# Altium PCB F_keys-leonardo-squeezed.PcbDoc
Units mil, origin at the board's own origin, x right, y up, seen from the top; angles counter-clockwise.
Board outline 11000 x 500 mil, 2 copper layers (Top Layer, Bottom Layer); 62 components, 56 nets, 261 pads, 90 vias.
Unrouted connection lines stored in the file: 3.
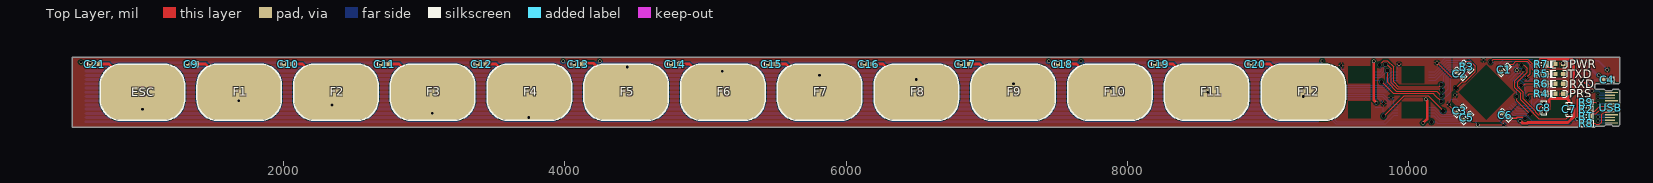
[diagram p0: Top Layer view]
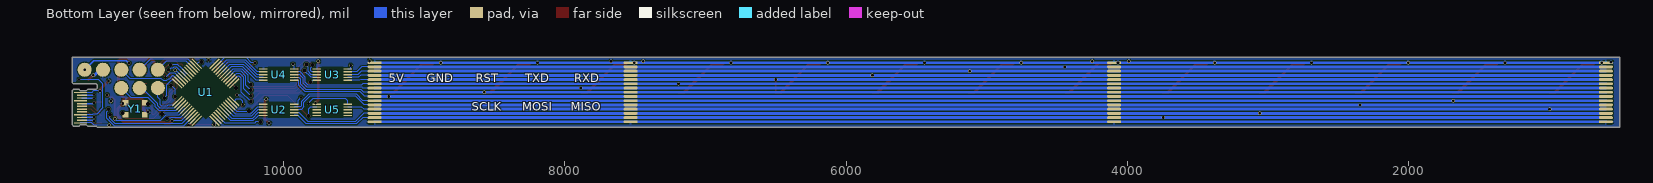
[diagram p1: Bottom Layer view, seen from below]
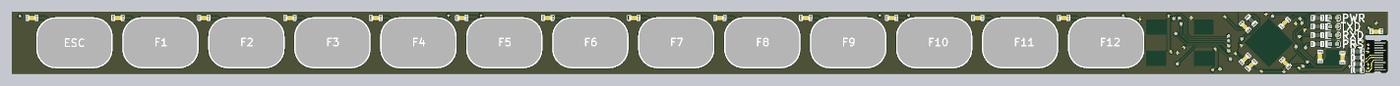
[diagram p2: 3D render of the assembled board from above, using the file's embedded part models]

## Layer stack, top to bottom
Top Solder: solder mask 0.4, Solder Resist, Dk 3.5
Top Layer: signal copper 1.4
Dielectric 1: dielectric 12.6, FR-4, Dk 4.8
Bottom Layer: signal copper 1.4
Bottom Solder: solder mask 0.4, Solder Resist, Dk 3.5

## Board outline
500,750 11320,750 11330,760 11390,760 11400,770 11440,770 11450,760 11490,760 11500,770 11500,1010 11490,1020 11450,1020 11440,1010 11400,1010 11390,1020 11330,1020 11320,1030 11320,1050 11330,1060 11490,1060 11500,1070 11500,1250 500,1250

## Design rules (kind name [scope] priority, off if disabled: settings)
Clearance [All] p1: gap=10 ignorepadtopadclearanceinfootprint=TRUE except(0: Arc-Hole Track-Hole SMDPad-Hole THPad-Hole Via-Hole Fill-Hole Poly-Hole Region-Hole Text-Hole; 6: Arc-Via Track-Via; 8: Arc-Arc Arc-Track Track-Track SMDPad-SMDPad)
ComponentClearance [All] p1 off: gap=10 collisioncheckmode=3 verticalgap=10 showdistances=FALSE
DiffPairsRouting [All] p1: maxlimit=10 minlimit=8 mostfreqgap=8 toplayer_minwidth=5 toplayer_maxwidth=15 toplayer_prefwidth=15 bottomlayer_minwidth=5 bottomlayer_maxwidth=15 bottomlayer_prefwidth=15 maxuncoupledlength=500
PolygonConnect [All] p1: connectstyle=Relief reliefconductorwidth=10 reliefentries=4 polygonreliefangle="90 Angle" airgapwidth=10
RoutingVias [All] p1: holewidth=28 width=50 viastyle="Through Hole" minholewidth=28 minwidth=50 maxholewidth=28 maxwidth=50
SolderMaskExpansion [All] p1: expansion=4 istentingtop=FALSE
Width [All] p1: maxlimit=100 minlimit=5 preferedwidth=10 minimp=50.000000 maximp=50.000000 favimp=50.000000
28 further rules are at their usual default settings.

## Classes and differential pairs
differential pair X: +X_P -X_N
differential pair D: +D_P -D_N
differential pair C: +C_P -C_N

## Components (designator, comment, footprint, x,y, rotation, side; value= is the part's Value field where it differs from the comment)
5V "Point" Point 11410,1160 r180 bottom
C1 "Cap" 0603P 10677.63,1160.55 r45 top value=0.1uF
C2 "Cap" 0603P 10360,1130 r315 top value=0.1uF
C3 "Cap" 0603P 10360,870 r225 top value=0.1uF
C4 "Cap" 0603P 11410,1090 r0 top value=1uF
C5 "Cap" 0603P 10410,820 r225 top value=0.1uF
C6 "Cap" 0603P 10684.09,835.91 r135 top value=1uF
C7 "Cap" 0603P 11140,880 r270 top value=10pF
C8 "Cap" 0603P 10960,890 r90 top value=10pF
C9 "Cap" 0603P 1347.5,1200 r180 top value=10pF
C10 "Cap" 0603P 2035,1200 r180 top value=10pF
C11 "Cap" 0603P 2722.5,1200 r180 top value=10pF
C12 "Cap" 0603P 3410,1200 r180 top value=10pF
C13 "Cap" 0603P 4097.5,1200 r180 top value=10pF
C14 "Cap" 0603P 4785,1200 r180 top value=10pF
C15 "Cap" 0603P 5472.5,1200 r180 top value=10pF
C16 "Cap" 0603P 6160,1200 r180 top value=10pF
C17 "Cap" 0603P 6847.5,1200 r180 top value=10pF
C18 "Cap" 0603P 7535,1200 r180 top value=10pF
C19 "Cap" 0603P 8222.5,1200 r180 top value=10pF
C20 "Cap" 0603P 8910,1200 r180 top value=10pF
C21 "Cap" 0603P 660,1200 r180 top value=10pF
ESC "Key" Key 1300,1200 r180 top
F1 "Key" Key 1987.5,1200 r180 top
F2 "Key" Key 2675,1200 r180 top
F3 "Key" Key 3362.5,1200 r180 top
F4 "Key" Key 4050,1200 r180 top
F5 "Key" Key 4737.5,1200 r180 top
F6 "Key" Key 5425,1200 r180 top
F7 "Key" Key 6112.5,1200 r180 top
F8 "Key" Key 6800,1200 r180 top
F9 "Key" Key 7487.5,1200 r180 top
F10 "Key" Key 8175,1200 r180 top
F11 "Key" Key 8862.5,1200 r180 top
F12 "Key" Key 9550,1200 r180 top
GND "Point" Point 11280,1160 r180 bottom
MISO "Point" Point 10890,1030 r90 bottom
MOSI "Point" Point 11020,1030 r90 bottom
PRS "LED0" D0603 11070,990 r270 top
PWR "LED0" D0603 11070,1200 r270 top
R1 "Res3" 0603L 11260,830 r180 top value=22
R2 "Res3" 0603L 11260,880 r180 top value=22
R3 "Res3" 0603L 10410,1180 r315 top value=1K
R4 "Res3" 0603L 10940,990 r180 top value=1K
R5 "Res3" 0603L 10940,1130 r180 top value=1K
R6 "Res3" 0603L 10940,1060 r180 top value=1K
R7 "Res3" 0603L 10940,1200 r180 top value=1K
R8 "Res3" 0603L 11260,780 r0 top value=1.5K
R9 "Res3" 0603L 11260,930 r0 top value=1.5K
RST "Point" Point 11150,1160 r180 bottom
RXD "LED0" D0603 11070,1060 r270 top
RXD "Point" Point 10890,1160 r180 bottom
SCLK "Point" Point 11150,1030 r90 bottom
TXD "LED0" D0603 11070,1130 r270 top
TXD "Point" Point 11020,1160 r180 bottom
U1 "ATmega32U4-AU" 32U4 10550,1000 r135 top
U2 "BS814A-1" BS814A-1 9950,935 r270 top
U3 "BS814A-1" BS814A-1 9570,1185 r270 top
U4 "BS814A-1" BS814A-1 9950,1185 r270 top
U5 "BS814A-1" BS814A-1 9570,935 r270 top
USB "TYPEC" TYPEC 11504.06,715 r180 top
Y1 "XTAL" 3225 11001.89,820.32 r0 top

## Footprints (in the part's own frame and the unit in brackets; to place one, negate y for a bottom-side part, rotate by r counter-clockwise, add the part's x,y. Pads: shape width x height; smd on the part's side, far side on the other; paste and mask are expansions set on the pad)
32U4 [mm]
  rect 2.5x0.25 smd far side: 1(-4.75,2.5) 2(-4.75,2) 3(-4.75,1.5) 4(-4.75,1) 5(-4.75,0.5) 6(-4.75,0) 7(-4.75,-0.5) 8(-4.75,-1) 9(-4.75,-1.5) 10(-4.75,-2) 11(-4.75,-2.5) 23(4.75,-2.5) 24(4.75,-2) 25(4.75,-1.5) 26(4.75,-1) 27(4.75,-0.5) 28(4.75,0) 29(4.75,0.5) 30(4.75,1) 31(4.75,1.5) 32(4.75,2) 33(4.75,2.5)
  rect 0.25x2.5 smd far side: 12(-2.5,-4.75) 13(-2,-4.75) 14(-1.5,-4.75) 15(-1,-4.75) 16(-0.5,-4.75) 17(0,-4.75) 18(0.5,-4.75) 19(1,-4.75) 20(1.5,-4.75) 21(2,-4.75) 22(2.5,-4.75) 34(2.5,4.75) 35(2,4.75) 36(1.5,4.75) 37(1,4.75) 38(0.5,4.75) 39(0,4.75) 40(-0.5,4.75) 41(-1,4.75) 42(-1.5,4.75) 43(-2,4.75) 44(-2.5,4.75)
0603L [mil]
  rect 30x30 smd: 1(-27.5,0) 2(27.5,0)
  silkscreen extent -50,-20 50,20, body extent -33,-16 31,16, height 21
0603P [mil]
  rect 30x30 smd: 1(-27.5,0) 2(27.5,0)
  silkscreen extent -50,-20 50,20, body extent -32,-16 32,16, height 28
3225 [mm]
  rect 1x1 smd far side: 1(-0.5,2.7) 2(3,0.5) GND(-0.5,0.5) GND(3,2.7)
BS814A-1 [mil]
  rect 10x60 smd far side: 1(20,-30) 2(40,-30) 3(60,-30) 4(80,-30) 5(100,-30) 6(100,190) 7(80,190) 8(60,190) 9(40,190) 10(20,190)
D0603 [mil]
  rect 30x30 smd: 1(0,27.5) 2(0,-27.5)
  silkscreen extent -27,-67 27,55, body extent -15,-39 15,38, height 12
Key [mil]
  rrect75% 600x400 smd mask+4: 1(300,200)
  silkscreen extent 0,0 600,400
Point [mil]
  round 100 smd: 1(0,0)
TYPEC [mm]
  rect 2.3x0.25 smd: A1(1.631,-1.691) A4(1.631,-3.191) A9(1.631,-5.691) A12(1.631,-7.191)
  rect 1.8x0.25 smd: A2(1.881,-2.191) A3(1.881,-2.691) A5(1.881,-3.691) A6(1.881,-4.191) A7(1.881,-4.691) A8(1.881,-5.191) A10(1.881,-6.191) A11(1.881,-6.691)
  rect 2.3x0.25 smd far side: B1(1.631,-7.191) B4(1.631,-5.691) B9(1.631,-3.191) B12(1.631,-1.691)
  rect 1.8x0.25 smd far side: B2(1.881,-6.691) B3(1.881,-6.191) B5(1.881,-5.191) B6(1.881,-4.691) B7(1.881,-4.191) B8(1.881,-3.691) B10(1.881,-2.691) B11(1.881,-2.191)
  Bottom Layer lines w0.254: 4.051,-2.028 3.888,-2.191 1.881,-2.191 ; 4.051,-2.79 3.952,-2.691 1.881,-2.691 ; 4.051,-5.33 3.912,-5.191 2.92,-5.191 1.881,-5.191 ; 4.051,-6.092 3.952,-6.191 1.881,-6.191 ; 4.051,-6.854 3.888,-6.691 1.881,-6.691

## Part data
C1 C2 C3 C4 C5 C6 C7 C8 C9 C10 C11 C12 C13 C14 C15 C16 C17 C18 C19 C20 C21: "Capacitor", LatestRevisionDate=17-Jul-2002, LatestRevisionNote="Re-released for DXP Platform.", PackageDescription="Radial Cap, Thru-Hole; 2 Leads; 0.3 in Pin Spacing", PackageReference=RAD-0.3, Published=8-Jun-2000, Publisher="Altium Limited"
PRS PWR RXD TXD: "Typical INFRARED GaAs LED", LatestRevisionDate=08-Jul-2005, LatestRevisionNote="Mech Layer 1 removed.", PackageDescription="LED; 2 Leads", PackageReference=LED-0, Published=8-Jun-2000, Publisher="Altium Limited"
R1 R2 R3 R4 R5 R6 R7 R8 R9: "Resistor", LatestRevisionDate=29-May-2009, LatestRevisionNote="IPC-7351 Footprint Added.", PackageDescription="Chip Resistor", PackageReference=J1-0603, Published=8-Jun-2000, Publisher="Altium Limited"
U1: "8-bit AVR Microcontroller, 2.7-5.5V, 32KB Flash, 2.5KB EEPROM, 1KB SRAM, USB Controller, 44-pin TQFP, Industrial Grade (-40癈 to 85癈)", Supplier Part Number 1=ATMEGA32U4-AU-ND, ComponentLink1Description="Manufacturer Link", ComponentLink1URL=http://www.atmel.com/products/avr/default.asp?, ComponentLink2Description="ATmega16U4/32U4 Datasheet", ComponentLink2URL=http://www.atmel.com/dyn/resources/prod_documents/doc7766.pdf, ComponentLink3Description="ATmega16U4 ATmega32U4 Summary", ComponentLink3URL=http://www.atmel.com/dyn/resources/prod_documents/7766S.pdf, ComponentLink4Description="Atmel.com Home", ComponentLink4URL=http://www.atmel.com, DatasheetVersion="revD, Jan-2009", PackageDescription="44-Pin Plastic Thin Quad Flat Pack, 10 x 10 x 1.0 mm Body, 0.8 mm Pitch (TQFP)", PackageReference=44ML, PackageVersion="rev.G, Jul-2007", Published=1-Apr-2010, Publisher="Altium Limited", Supplier 1=Digi-Key, Supplier 2=Farnell, Supplier 3=Mouser, Supplier Part Number 2=1748525, Supplier Part Number 3=556-ATMEGA32U4-AU
Y1: "Crystal Oscillator", LatestRevisionDate=17-Jul-2002, LatestRevisionNote="Re-released for DXP Platform.", PackageDescription="Crystal, Thru-Hole; 2 Leads; Body 3.1 x 8.2 mm (Dia.xH)", PackageReference=R38, Published=8-Jun-2000, Publisher="Altium Limited"

## Free pads (board coordinates)
  rrect100% 100x20 smd far side: trans_1(600,1150) trans_1(4095,1150) trans_1(7530,1150) trans_1(9350,1150) trans_2(600,1120) trans_2(4095,1120) trans_2(7530,1120) trans_2(9350,1120) trans_3(600,1090) trans_3(4095,1090) trans_3(7530,1090) trans_3(9350,1090) trans_4(600,1060) trans_4(4095,1060) trans_4(7530,1060) trans_4(9350,1060) trans_5(600,1030) trans_5(4095,1030) trans_5(7530,1030) trans_5(9350,1030) trans_6(600,1000) trans_6(4095,1000) trans_6(7530,1000) trans_6(9350,1000) trans_7(600,970) trans_7(4095,970) trans_7(7530,970) trans_7(9350,970) trans_8(600,940) trans_8(4095,940) trans_8(7530,940) trans_8(9350,940) trans_9(600,1180) trans_9(4095,1180) trans_9(7530,1180) trans_9(9350,1180) trans_10(600,910) trans_10(4095,910) trans_10(7530,910) trans_10(9350,910) trans_11(600,880) trans_11(4095,880) trans_11(7530,880) trans_11(9350,880) trans_12(600,850) trans_12(4095,850) trans_12(7530,850) trans_12(9350,850) trans_13(600,820) trans_13(4095,820) trans_13(7530,820) trans_13(9350,820) trans_14(600,1210) trans_14(4095,1210) trans_14(7530,1210) trans_14(9350,1210) trans_15(600,790) trans_15(4095,790) trans_15(7530,790) trans_15(9350,790)

## Via types
v1: diameter 23.62, hole 19.68, Top Layer to Bottom Layer, 61 vias
v2: diameter 28, hole 28, Top Layer to Bottom Layer, 24 vias
v3: diameter 20, hole 19.5, Top Layer to Bottom Layer, tented both sides, 5 vias

## Nets (pads, with @x,y where several pads share a name; then routed paths per layer and width w, separated by ;. In a path a pad name is that pad's centre, name@x,y a point inside that pad or via, vN(x,y) a via of type N, cw(c..) or ccw(c..) an arc to the next point about the centre after c; other vN are vias at no path point)
00R: RXD.1@10890,1160 U1.20 | length 293.4
  Bottom Layer w8: U1.20 10641.56,1173.99 10687.56,1220 10830,1220 RXD.1@10890,1160
01T: TXD.1@11020,1160 U1.21 | length 433.1
  Bottom Layer w8: U1.21@10634.86,1196.22 10674.64,1236 10944,1236 TXD.1@11020,1160
02: U1.19
03: U1.18
04: U1.25 U4.9 | length 376
  Bottom Layer w8: U4.9 10182.37,1145 10265.05,1227.68 10404.76,1227.68 10458.44,1173.99 U1.25
05*: U1.31 U3.7 | length 887.2
  Top Layer w8: v2(9848.06,1153.46) 9848.06,1071.68 9911.75,1008 10197,1008 v2(10230,975)
  Bottom Layer w8: U3.7 9761,1106 9801.05,1106 9848.06,1153.01 v2(9848.06,1153.46) ; v2(10230,975) 10279.89,1024.89 10279.89,1106.38 10304.42,1130.92 10334.49,1130.92 10374.93,1090.48 U1.31
06*: U1.27 U4.7 | length 349.8
  Bottom Layer w8: U4.7 10187.63,1105 10262.63,1180 10263,1180 10278.68,1195.68 10381.08,1195.68 10430.6,1146.15 U1.27
07: U1.1
08*: U1.28 U4.6 | length 336.6
  Bottom Layer w8: U4.6 10141,1086 10170.34,1086 10191.63,1086 10285.3,1179.68 10369.24,1179.68 10416.69,1132.23 U1.28
09*: U1.29 U3.9 | length 957.6
  Top Layer w8: v2(9790,1195) 9820.29,1225.29 9846.6,1225.29 9892.06,1179.83 9892.06,1072.94 9925,1040 10215,1040 v2(10230,1055)
  Bottom Layer w8: U3.9 9761,1146 9795.8,1146 9804.06,1154.26 9804.06,1175.74 9790,1189.8 v2(9790,1195) ; v2(10230,1055) 10230,1060 10247.89,1077.89 10247.89,1119.64 10291.93,1163.68 10357.4,1163.68 10402.77,1118.32 U1.29
10*: U1.30 U3.8 | length 924.8
  Top Layer w8: v2(9835,1197.29) 9838.83,1193.47 9848.94,1193.47 9876.06,1166.35 9876.06,1066.31 9918.37,1024 10215.59,1024 10224.59,1015 v2(10230,1015)
  Bottom Layer w8: U3.8 9761,1126 9798.43,1126 9820.06,1147.64 9820.06,1176.94 9835,1191.88 v2(9835,1197.29) ; v2(10230,1015) 10263.89,1048.89 10263.89,1113.01 10298.56,1147.68 10346.64,1147.68 U1.30
11*: R4.2 U1.12 | length 295.3
  Top Layer w8: v2(10844.53,960.53) 10847.83,963.83 10847.83,981.4 10856.43,990 R4.2
  Bottom Layer w8: U1.12 10783.15,1093.96 10784.45,1093.96 10804.46,1073.95 10805.94,1073.95 10826,1053.89 10826,979.05 v2(10844.53,960.53)
12: U1.26 U4.8 | length 362.9
  Bottom Layer w8: U4.8 10185,1125 10271.68,1211.68 10392.92,1211.68 10444.52,1160.07 U1.26
13*: U1.32 U3.6 | length 801
  Top Layer w8: v2(9806.26,1074) 9806.26,1073.74 9888,992 10173,992 10182,983 v2(10230,935)
  Bottom Layer w8: U3.6 9785,1085 9792.43,1077.57 9802.69,1077.57 v2(9806.26,1074) ; v2(10230,935) 10295.89,1000.89 10295.89,1099.76 10311.05,1114.92 10322.65,1114.92 10329.58,1107.99 10330.66,1107.99 U1.32@10353.78,1084.86
18: R6.2 U1.8 | length 545.9
  Top Layer w8: v2(10766.73,970) 10767.37,969.36 10767.37,938.59 v2(10860,845.96) ; v2(10796,1049.95) 10799.83,1053.78 10819.83,1053.78 10826.05,1060 R6.2
  Bottom Layer w8: U1.8 10753.68,852 10840.4,852 10842.62,849.78 10856.17,849.78 v2(10860,845.96) ; v2(10766.73,970) 10766.73,1020.68 v2(10796,1049.95)
+5: 5V.1 C1.2 C2.2 C3.2 C4.2 PRS.1 PWR.1 RXD.1@11097.5,1060 TXD.1@11097.5,1130 U1.2 U1.7 U1.14 U1.24 U1.34 U1.44 U2.1 U3.1 U4.1 U5.1 USB.B9 | length 3561.5
  Top Layer w8: v1(10200,1210) 10299.45,1110.55 C2.2 ; v1(10286.15,913.12) 10289.14,910.13 10289.14,901.97 C3.2 ; v1(10490,770) 10492.33,767.67 10670.35,767.67 v1(10672.67,765.35) ; 10710,1190 10719.45,1199.45 10740.79,1199.45 10759.94,1218.59 10839.46,1218.59 10862.11,1195.94 10862.11,1132.11 v1(10835.42,1105.42)
  Top Layer w10: v1(11095.48,1206.73) 11095.48,1202.02 PWR.1 ; v1(11196.05,811.04) 11198,812.99 11198,946.71 11214.54,963.25 11229.57,963.25 11246.31,980 v1(11250,980)
  Bottom Layer w8: v1(9520,1190) 9520,1166 9521,1165 U3.1 ; U5.1 9540,940 9554,954 9787.81,954 9820,921.81 v1(9820,920) ; v1(9872.92,962.92) 9894,941.85 9894,916 9895,915 U2.1 ; U4.1 9920,1185.77 9930,1195.77 v1(9930,1200) ; v1(10200,1210) 10224.75,1210 10258.42,1243.68 10416.6,1243.68 10472.36,1187.91 U1.24 ; v1(10286.15,913.12) 10286.93,913.9 10286.93,936.93 10299.33,949.33 10336.2,949.33 U1.34 ; U1.44 10475.25,786.05 10475.25,784.75 v1(10490,770) ; U1.2 10626.56,811.78 10672.67,765.66 v1(10672.67,765.35) ; U1.7 10697.23,881.68 10742.92,836 10833.77,836 10872.33,797.44 11025.33,797.44 11182.45,797.44 v1(11196.05,811.04) ; U1.14 10767.28,1133.76 10807.09,1133.76 v1(10835.42,1105.42) ; 5V.1@11390,1160 v1(11410,1160) ; USB.B9 11439.21,840 11357.69,840 11352.85,844.84 11325.16,844.84 11280,890 11280,1060 11310,1090 v1(11450,1090)
  Bottom Layer w10: v1(11095.48,1206.73) 11096.86,1206.73 11115.13,1225 11345,1225 v1(11410,1160)
A0: U1.36 U5.9 | length 797.2
  Top Layer w8: v2(9820,830) 9966,976 10135.96,976 v2(10243.96,868)
  Bottom Layer w8: U5.9 9761,894 9806,894 9816.17,883.83 9816.17,833.83 v2(9820,830) ; v2@10248.65,868 10249.37,868 10257.37,860 10327.56,860 10376.01,908.44 U1.36
A1: U1.37 U2.9 | length 292.4
  Bottom Layer w8: U2.9 10183.02,895 10234.02,844 10338.32,844 U1.37
A2: U1.38 U2.8 | length 305.6
  Bottom Layer w8: U2.8 10141,874 10181.39,874 10227.39,828 10350.16,828 U1.38
A3: U1.39 U2.7 | length 318.7
  Bottom Layer w8: U2.7 10141,854 10178.77,854 10220.77,812 10362,812 U1.39
A4: U1.40 U2.6 | length 305.9
  Bottom Layer w8: U2.6 10141,834 10176,834 10190,820 10190.14,820 10214.14,796 10373.84,796 U1.40@10413.38,835.54
A5: U1.41
C_N: R2.1 USB.A7 | length 164.1
  Top Layer w8: R2.1 11298.5,869 11298.5,868.69 11303.19,864 11322.22,864 11357.06,898.84 11388.69,898.84 11388.77,898.92 11429.24,898.92 USB.A7
C_P: R1.1 USB.A6 | length 164.1
  Top Layer w8: R1.1 11298.5,841 11298.5,841.31 11303.19,846 11329.67,846 11364.52,880.84 11388.69,880.84 11388.77,880.76 11429.24,880.76 USB.A6
D_N: R2.2 U1.3 | length 743.8
  Top Layer w8: R2.2 11240.21,880 v2(11241.21,879)
  Bottom Layer w8: U1.3 10641.56,826.01 10679.92,787.65 10681.22,787.65 10711.23,757.63 11196.22,757.63 11254,815.41 11254,862.44 11241.21,875.23 v2(11241.21,879)
D_P: R1.2 U1.4 | length 657.3
  Top Layer w15: v2(11230,840) 11232.5,837.5 R1.2
  Bottom Layer w8: U1.4 10718.69,775.63 11191.59,775.63 11232.6,816.64 11232.6,837.4 v2(11230,840)
ESC: C21.1 ESC.1 pad.trans_11 U5.2 | length 9341.6
  Top Layer w20: C21.1 762.01,1200 962.01,1000 ESC.1
  Bottom Layer w8: pad.trans_11@9350,880 9425,880 9440,895 U5.2
  Bottom Layer w20: pad.trans_11@600,880 4095,880 7530,880 pad.trans_11@9350,880
  other v1: 1000,880
F1: C9.1 F1.1 pad.trans_8 U2.2 | length 9792.6
  Top Layer w20: C9.1 1449.51,1200 1649.51,1000 F1.1
  Bottom Layer w8: pad.trans_8@9350,940 9432.37,940 9478.37,986 9819,986 9868,937 9868,902 9874,896 9919,896 U2.2
  Bottom Layer w20: pad.trans_8@600,940 4095,940 7530,940 pad.trans_8@9350,940
  other v1: 1685,940
F2: C10.1 F2.1 pad.trans_10 U2.3 | length 9800
  Top Layer w20: C10.1 2137.01,1200 2337.01,1000 F2.1
  Bottom Layer w8: pad.trans_10@9350,910 9425,910 9485,970 9812.37,970 9852,930.37 9852,895.37 9872.37,875 U2.3
  Bottom Layer w20: pad.trans_10@600,910 4095,910 7530,910 pad.trans_10@9350,910
  other v1: 2347.5,910
F3: C11.1 F3.1 pad.trans_12 U2.4 | length 9766.3
  Top Layer w20: C11.1 2824.51,1200 3024.51,1000 F3.1
  Bottom Layer w8: pad.trans_12@9350,850 9427.63,850 9486.63,791 9821,791 9884.51,854.51 9919.51,854.51 U2.4
  Bottom Layer w20: pad.trans_12@600,850 4095,850 7530,850 pad.trans_12@9350,850
  other v1: 3060,850
F4: C12.1 F4.1 pad.trans_13 U2.5 | length 9758.8
  Top Layer w20: C12.1 3512.01,1200 3712.01,1000 F4.1
  Bottom Layer w8: pad.trans_13@9350,820 9435,820 9480,775 9835,775 9895,835 U2.5
  Bottom Layer w20: pad.trans_13@600,820 4095,820 7530,820 pad.trans_13@9350,820
  other v1: 3745,820
F5: C13.1 F5.1 pad.trans_9 U3.2 | length 9355.2
  Top Layer w20: C13.1 4130,1205 4140.26,1205 4141.72,1206.46 4205.97,1206.46 4412.42,1000 F5.1
  Bottom Layer w8: pad.trans_9@9350,1180 9440,1180 9475,1145 U3.2
  Bottom Layer w20: pad.trans_9@600,1180 4095,1180 7530,1180 pad.trans_9@9350,1180
  other v1: 4445,1180
F6: C14.1 F6.1 pad.trans_1 U3.3 | length 9345.7
  Top Layer w20: C14.1 4887.01,1200 5087.01,1000 F6.1
  Bottom Layer w8: pad.trans_1@9350,1150 9445,1150 9470,1125 U3.3
  Bottom Layer w20: pad.trans_1@600,1150 4095,1150 7530,1150 pad.trans_1@9350,1150
  other v1: 5120,1150
F7: C15.1 F7.1 pad.trans_2 U3.4 | length 9341.6
  Top Layer w20: C15.1 5574.51,1200 5774.51,1000 F7.1
  Bottom Layer w8: pad.trans_2@9350,1120 9450,1120 9465,1105 U3.4
  Bottom Layer w20: pad.trans_2@600,1120 4095,1120 7530,1120 pad.trans_2@9350,1120
  other v1: 5812.5,1120
F8: C16.1 F8.1 pad.trans_3 U3.5 | length 9427.4
  Top Layer w10: F8.1 v1(6500,1090)
  Top Layer w20: C16.1 6262.01,1200 6462.01,1000 F8.1
  Bottom Layer w8: pad.trans_3@9350,1090 9450,1090 9455,1085 U3.5
  Bottom Layer w20: pad.trans_3@600,1090 pad.trans_3@9350,1090
F9: C17.1 F9.1 pad.trans_4 U4.2 | length 9780.6
  Top Layer w20: C17.1 6949.51,1200 7149.51,1000 F9.1
  Bottom Layer w8: pad.trans_4@9350,1060 9435,1060 9445,1050 9822.12,1050 9842,1069.88 9842,1107.05 9878.95,1144 9919,1144 U4.2
  Bottom Layer w20: pad.trans_4@600,1060 4095,1060 7530,1060 pad.trans_4@9350,1060
  other v1: 7190,1060
F10: C18.1 F10.1 pad.trans_5 U4.3 | length 9776.5
  Top Layer w20: C18.1 7637.01,1200 7837.01,1000 F10.1
  Bottom Layer w8: pad.trans_5@9350,1030 9434.75,1030 9438.75,1034 9828.75,1034 9858,1063.25 9858,1100.43 9881.57,1124 9919,1124 U4.3
  Bottom Layer w20: pad.trans_5@600,1030 4095,1030 7530,1030 v1(7885,1030) pad.trans_5@9350,1030
F11: C19.1 F11.1 pad.trans_6 U4.4 | length 9780.6
  Top Layer w20: C19.1 8324.51,1200 8524.51,1000 F11.1
  Bottom Layer w8: pad.trans_6@9350,1000 9427.37,1000 9445.37,1018 9835.37,1018 9874,1056.63 9874,1093.8 9884.2,1104 9919,1104 U4.4
  Bottom Layer w20: pad.trans_6@600,1000 4095,1000 7530,1000 v1(8570,1000) pad.trans_6@9350,1000
F12: C20.1 F12.1 pad.trans_7 U4.5 | length 9780.6
  Top Layer w20: C20.1 9012.01,1200 9212.01,1000 F12.1
  Bottom Layer w8: pad.trans_7@9350,970 9420,970 9452,1002 9842,1002 9890,1050 9890,1080 9895,1085 U4.5
  Bottom Layer w20: pad.trans_7@600,970 4095,970 7530,970 v1(9250,970) pad.trans_7@9350,970
GND: C1.1 C2.1 C3.1 C4.1 C5.1 C6.2 C7.1 C8.1 C9.2 C10.2 C11.2 C12.2 C13.2 C14.2 C15.2 C16.2 C17.2 C18.2 C19.2 C20.2 C21.2 GND.1 pad.trans_14 pad.trans_15 R3.2 R7.2 R8.1 R9.1 U1.5 U1.15 U1.23 U1.35 U1.43 U2.10 U3.10 U4.10 U5.10 USB.B1 USB.B12 Y1.GND | length 20284.7
  Top Layer w20: v1(9750,1220) 9750,945.48 9770,925.48 v1(9770,924.5) ; v1(10100,780) 10100,780.98 10130,810.98 10130,939.02 10120,949.02 v1(10120,950) ; v1(10790,798.19) 10790.98,798.19 10809.17,780 10840,780 10845,785 11130.78,785 11175,829.22 11175,885 11146.25,913.75 v1(11140,920) 11140,940 11125,955 ; R7.2 10917.5,1205 10917.5,1217.5 10935,1235 11158.28,1235 11170,1223.28 11170,1000 11125,955 ; v1(10960,860) C8.1 10965,867.5 10983.28,867.5 10995,879.22 10995,943.28 11006.72,955 11125,955 ; C7.1@11135,920 11135,912.5 C7.1 ; v1(11240,1080) 11301.12,1018.88 11301.12,1010.69 v1(11301.81,1010) ; v1(11350,1120) 11350.69,1119.31 11353.19,1119.31 C4.1
  Bottom Layer w8: U5.10 9769,915 9770,916 v1(9770,924.5) ; U1.5 10723.97,798.19 v1(10790,798.19) ; U1.15 10711.15,1104.4 10763.05,1156.29 v1(10766.91,1156.29) ; v1(11234.72,765.28) 11343.29,765.28 11359.58,781.58 USB.B12 ; v1(11301.81,1010) 11347.69,1010 11359.58,998.11 USB.B1
  Bottom Layer w10: v1(564.07,1214.07) 568.14,1210 pad.trans_14@600,1210 ; pad.trans_14@9350,1210 9380.64,1210 9385.13,1214.49 9385.13,1221.68 v1(9385.26,1221.81)
  Bottom Layer w20: pad.trans_15@600,790 4095,790 7530,790 pad.trans_15@9350,790 ; pad.trans_14@600,1210 4095,1210 7530,1210 pad.trans_14@9350,1210 ; GND.1 11301.65,1160 11340.95,1120.69 11349.31,1120.69 v1(11350,1120)
  other v1: 11225.31,937.19 10330,980 630,1210 1317.5,1210 2005,1210 2692.5,1210 3380,1210 4067.5,1210 4755,1210 5442.5,1210 6130,1210 6817.5,1210 7505,1210 8192.5,1210 8880,1210 3990,1220 4250,1220 7440,1220 7670,1220 10530,1230
MISO: MISO.1 U1.11 | length 264.5
  Bottom Layer w8: U1.11 10783.15,906.04 10821.16,906.04 10825.25,901.96 10861.96,901.96 10872.4,912.4 10872.4,946.8 10890,964.4 MISO.1
MOSI: MOSI.1 U1.10 | length 366.5
  Bottom Layer w8: U1.10 10738.99,923.44 10777.35,885.08 10823.95,885.08 10824.82,885.96 10871.41,885.96 10890.4,904.94 10890.4,919.43 11000.97,1030 MOSI.1
NetC5_2: C5.2 U1.42 | length 322.7
  Bottom Layer w8: v2(10160,790) 10192.84,790 10202.84,780 10412.44,780 10458.44,826.01 U1.42
NetC6_1: C6.1 U1.6 | length 288.7
  Top Layer w10: C6.1@10705.61,816.46 10764.66,816.46 10769.39,821.19 10809.77,821.19 10818.96,812 v2(10823.83,812)
  Bottom Layer w8: U1.6 10730,820 10799.03,820 10803.21,815.83 10820,815.83 v2(10823.83,812)
NetPRS_2: PRS.2 R4.1 | length 75
  Top Layer w8: R4.1 PRS.2
NetPWR_2: PWR.2 R7.1 | length 93.2
  Top Layer w8: R7.1 10989.5,1178 11020.5,1178 PWR.2
NetR3_1: R3.1 U1.33 | length 326.3
  Top Layer w8: v2(10334,1030) 10379.34,1075.34 10400.34,1075.34 10470,1145 10470,1185.31 10435.31,1220 10411.11,1220 R3.1
NetR5_1: R5.1 TXD.2 | length 75
  Top Layer w8: R5.1 TXD.2
NetR5_2: R5.2 U1.22 | length 444.4
  Top Layer w8: v2(10580,1213.45) 10601.21,1234.66 10846.02,1234.66 10878.11,1202.57 10878.11,1164.39 R5.2
  Bottom Layer w8: v2(10580,1213.45) 10601.02,1213.45 U1.22
NetR6_1: R6.1 RXD.2 | length 75
  Top Layer w8: R6.1 RXD.2
NetR8_2: R8.2 USB.A5 | length 215.2
  Top Layer w8: R8.2 11321.93,780 11331.08,770.84 11354.51,770.84 11371.64,787.97 11371.64,842.42 11388.77,859.55 11429.24,859.55 USB.A5
NetR9_2: R9.2 USB.B5 | length 62.1
  Top Layer w8: R9.2 11336.16,930 v3@11345.68,920.48
  other v3: 11344.57,924.84
RST: RST.1 U1.13 | length 477.6
  Bottom Layer w8: U1.13 10738.99,1076.56 10779.84,1117.4 10786.46,1117.4 10809.91,1093.96 10816.04,1093.96 10830,1080 10849.49,1080 10865.49,1096 11086,1096 RST.1
SCLK: SCLK.1 U1.9 | length 518.8
  Bottom Layer w8: U1.9 10765.52,868 10829.49,868 10831.45,869.96 10880.87,869.96 10908.4,897.49 10908.4,911.98 10956.72,960.3 11080.3,960.3 SCLK.1
X_N: C7.2 U1.16 Y1.2 | length 845.9
  Top Layer w8: v2(10816,1160) 10814.46,1158.46 10814.46,1140.77 10754,1080.3 10754,1032.56 10794.73,991.83 10794.73,945.17 10884,855.9 10884,849.59 10923.59,810 11120,810 11140,830 v2(11140,852.5)
  Bottom Layer w8: U1.16 10696.15,1119.4 10734.51,1157.75 10734.51,1157.87 10754.75,1178.1 10775.94,1178.1 10783.45,1170.59 10799.99,1170.59 10810.59,1160 v2(10816,1160)
X_P: C8.2 U1.17 Y1.1 | length 710.9
  Top Layer w8: v2(10800.28,1194.59) 10804.1,1190.77 10819.17,1190.77 10840,1169.94 10840,1140.85 10772,1072.85 10772,1040.01 10812.73,999.28 10812.73,952.63 10902,863.35 10902,857.05 10918.27,840.78 10924.9,840.78 10931,846.88 10931,888.5 v2(10960,917.5)
  Bottom Layer w8: U1.17 10683.31,1132.23 10721.67,1170.59 10721.79,1170.59 10747.3,1196.1 10798.77,1196.1 v2(10800.28,1194.59)
pads on no net: U5.3 U5.4 U5.5 U5.6 U5.7 U5.8 USB.A1 USB.A2 USB.A3 USB.A4 USB.A8 USB.A9 USB.A10 USB.A11 USB.A12 USB.B2 USB.B3 USB.B4 USB.B6 USB.B7 USB.B8 USB.B10 USB.B11
copper on no net:
  other v3: 11344.57,794.84 11344.57,824.84 11344.57,954.84 11344.57,984.84

## Polygon pours and split planes (outlines as drawn)
+5 on Top Layer "+5_L01_P001" (solid, pour order 1): 500,1250 10301,1250 10301,1130 10310,1121 10391,1121 10391,1093.73 10373.64,1076.36 10323.64,1026.36 10300.25,1000 10300.25,930 10323.64,903.64 10433.64,793.64 10450.25,780 10647.31,780 10686.36,813.64 10736.36,863.64 10820,954.06 10820,1250 11500,1250 11500,1075 11325,1075 11325,750 500,750
GND on Top Layer "GND_L01_P003" (solid, pour order 3): 10310,1250 10310,1130 10390,1130 10410,1110 10393.73,1093.73 10391,1093.73 10307.65,1010.37 10307.65,932.35 10449.5,790.5 10650.5,790.5 10815.96,955.96 10815.96,1250
GND on Bottom Layer "GND_L02_P002" (solid, pour order 2): 11500,1250 11500,1075 11325,1075 11325,750 500,750 500,1250

## Other copper
Top Layer:
  pour cut-out: 9730,935 9730,815 9570,815 9570,935
  pour cut-out: 9950,935 10110,935 10110,815 9950,815
  pour cut-out: 9950,1185 10110,1185 10110,1065 9950,1065
  pour cut-out: 9570,1185 9730,1185 9730,1065 9570,1065
  pour cut-out: 10744.87,1000 10550,1194.87 10355.13,1000 10550,805.13
  pour cut-out: 11001.89,946.3 11100.32,946.3 11100.32,820.32 11001.89,820.32
Bottom Layer:
  pour cut-out: 9730,935 9730,815 9570,815 9570,935
  pour cut-out: 9950,935 10110,935 10110,815 9950,815
  pour cut-out: 9950,1185 10110,1185 10110,1065 9950,1065
  pour cut-out: 9570,1185 9730,1185 9730,1065 9570,1065
  pour cut-out: 10744.87,1000 10550,1194.87 10355.13,1000 10550,805.13
  pour cut-out: 11001.89,946.3 11100.32,946.3 11100.32,820.32 11001.89,820.32

## Silkscreen, mask and mechanical layers (free items; w line width, h text height)
Mechanical 1:
  lines w10: 11290,750 500,750 500,1250 11500,1250 11500,1070 11490,1060 11330,1060 11319.57,1049.57 11319.57,1029.8 ; 11290.12,749.88 11319.57,749.88
Mechanical 11:
  the board outline again, w10